# Altium PCB Elreg_Sender_NoFPGA.PcbDoc (part 2 of 2)
Units mil, origin at the board's own origin, x right, y up, seen from the top; angles counter-clockwise.
Board outline 6000 x 4000 mil, 4 copper layers (Top Layer, L2_GND, L3_GND, Bottom Layer), stack 62.362 mil thick; 139 components, 68 nets, 309 pads, 0 vias.
Unrouted connection lines stored in the file: 233.
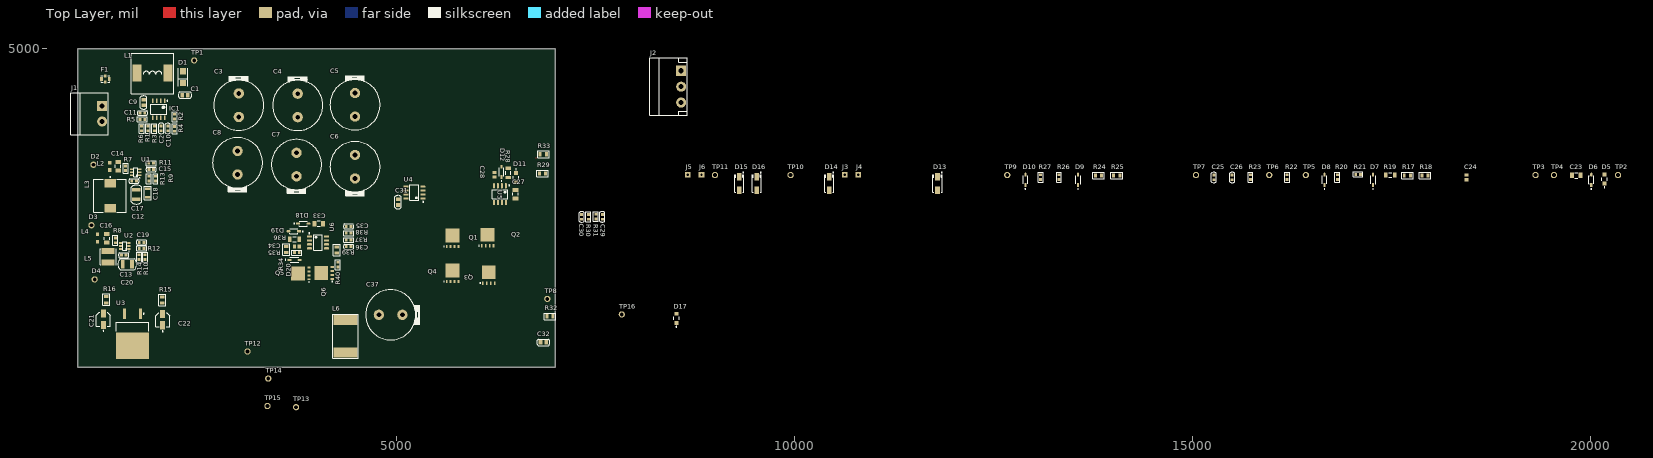
[diagram p0: Top Layer view]

## Nets (pads, with @x,y where several pads share a name; then routed paths per layer and width w, separated by ;. In a path a pad name is that pad's centre, name@x,y a point inside that pad or via, vN(x,y) a via of type N, cw(c..) or ccw(c..) an arc to the next point about the centre after c; other vN are vias at no path point) (continued)
NetD10_1: D10.1 Q4.4 R24.2 R27.2 TP8.1
NetD11_1: D11.1 D12.1 R28.1 TP9.1 U5.2
NetD13_1: D13.1 D14.2 J4.1
NetD13_2: D13.2 D14.1
NetD15_1: D15.1 D16.2
NetD15_2: D15.2 D16.1 J6.1 R32.2
NetD17_1: D17.1 D18.1 R36.1 TP12.1 U6.2
NetD19_1: D19.1 Q5.4 R34.2 R35.2 TP13.1
NetD20_1: D20.1 Q6.4 R39.2 R40.2 TP16.1
NetIC1_5: IC1.5 R5.2
NetIC1_6: IC1.6 R1.1 R3.2 R6.2
NetR7_2: R7.2 U1.4
NetR8_2: R8.2 U2.4
NetR22_1: R22.1
NetR23_1: R23.1
NetR29_1: R29.1 R30.1
NetR31_1: R31.1 R33.2
NetR37_1: R37.1
NetR38_1: R38.1
V_MOD: Q1.5 Q2.5
VIN: C9.1 F1.3 IC1.2 L1.1 L2.1 R2.2
VTX: C1.1 C3.1 C4.1 C5.1 C6.1 C7.1 C8.1 D1.2 R1.2 TP1.1
pads on no net: C37.1 J2.1 J2.2 J2.3 L6.2 Q5.5

## Polygon pours and split planes (outlines as drawn)
GND on L2_GND (split plane): 5994.81,0 35,0 35,3959.81 5994.81,3959.81
GND on L3_GND (split plane): 5994.81,0 35,0 35,3959.81 5994.81,3959.81